# Altium PCB DueShield.PcbDoc
Units mil, origin at the board's own origin, x right, y up, seen from the top; angles counter-clockwise.
Board outline 4000 x 2100 mil, 2 copper layers (Top, Bottom), stack 65.748 mil thick; 9 components, 2 nets, 102 pads, 0 vias.
Unrouted connection lines stored in the file: 3.
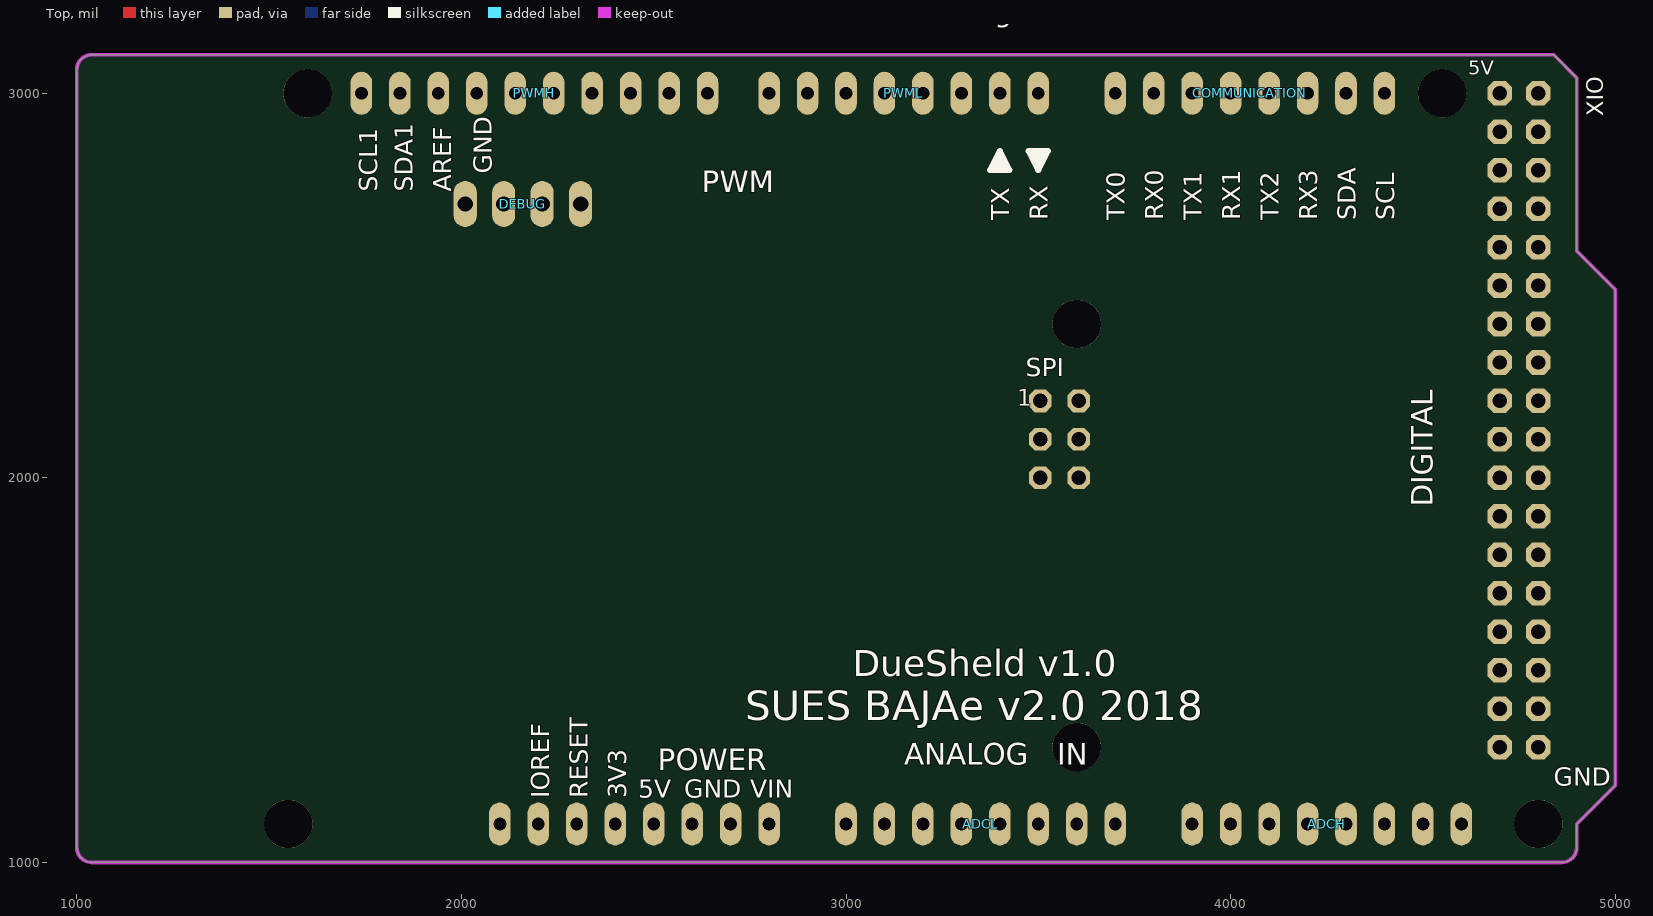
[diagram p0: Top view]
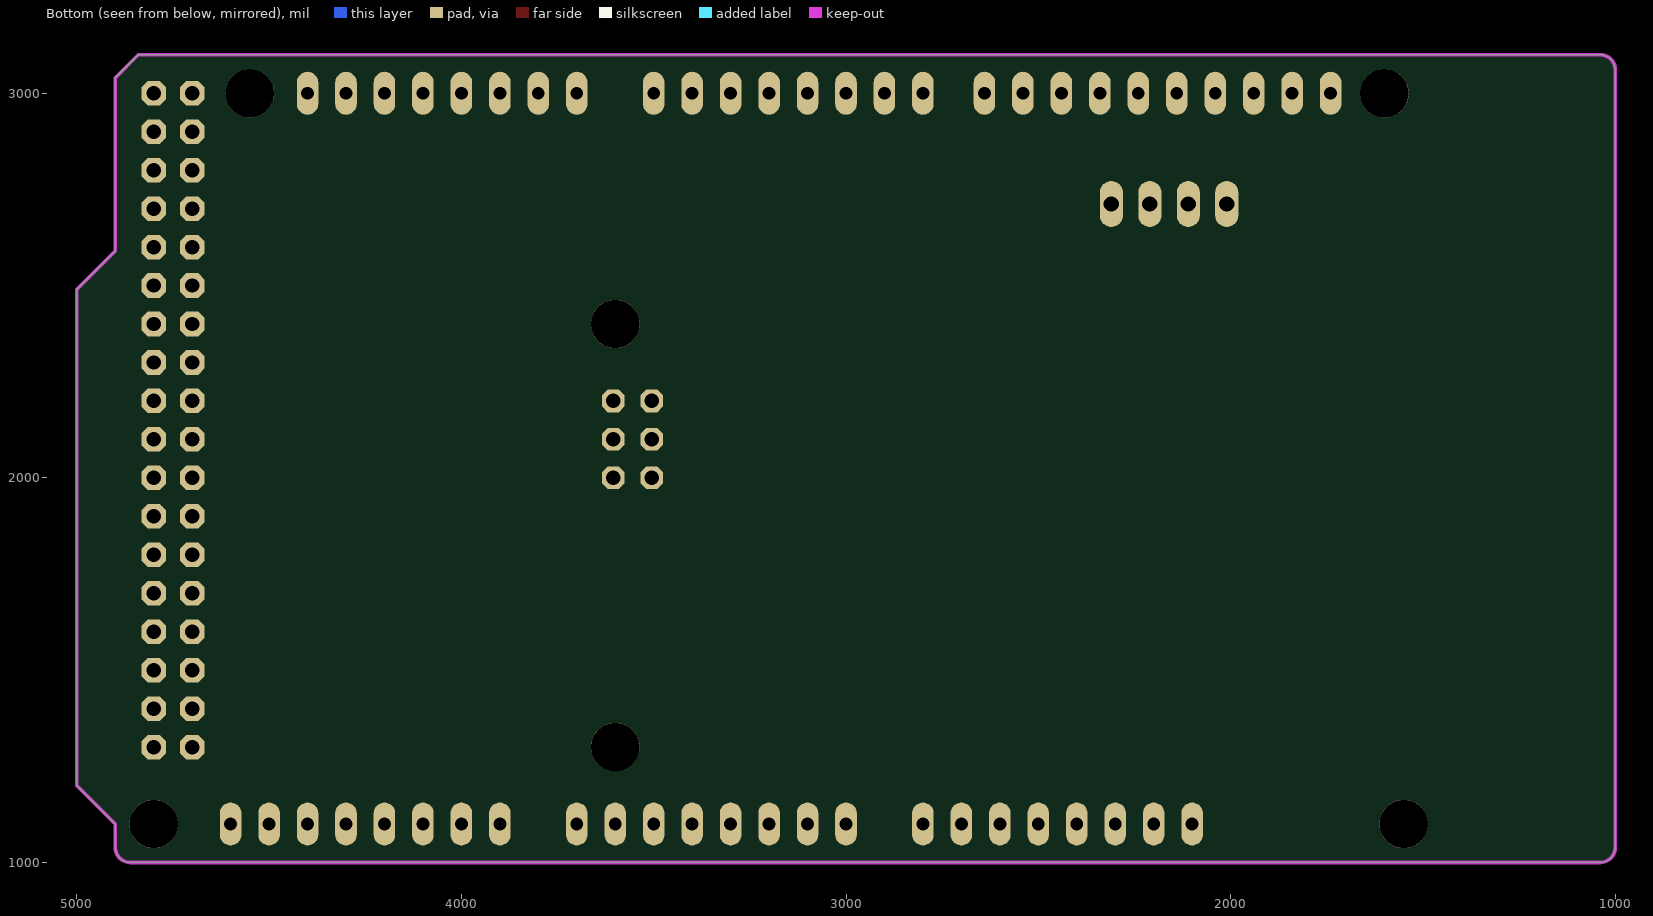
[diagram p1: Bottom view, seen from below]

## Layer stack, top to bottom
Top Solder: solder mask 0.4, Solder Resist, Dk 3.5
Top: signal copper 1.378
Dielectric 1: core 62.9921, FR-4, Dk 4.8
Bottom: signal copper 1.378
Bottom Solder: solder mask 0.4, Solder Resist, Dk 3.5

## Board outline
1039.37,3100 4840,3100 4900,3040 4900,2590 5000,2490 5000,1200 4900,1100 4900,1039.37 cw(c4860.63,1039.37) 4860.63,1000 1039.37,1000 cw(c1039.37,1039.37) 1000,1039.37 1000,3060.63 cw(c1039.37,3060.63)

## Design rules (kind name [scope] priority, off if disabled: settings)
Clearance [All] p1: gap=8 ignorepadtopadclearanceinfootprint=FALSE except(0: SMDPad-SMDPad SMDPad-THPad SMDPad-Via)
Clearance "Clearance (Same Net)" [All] p2: gap=0 ignorepadtopadclearanceinfootprint=FALSE except(6: SMDPad-SMDPad SMDPad-THPad SMDPad-Via)
HoleSize HoleSize_1 [All] p1: absolutevalues=TRUE maxlimit=100000 minlimit=16 maxpercent=80.000 minpercent=20.000
HoleSize [All] p2: absolutevalues=TRUE maxlimit=100 minlimit=1 maxpercent=80.000 minpercent=20.000
HoleToHoleClearance mdViaViaSameLayer [All] p1: gap=8 allowstackedmicrovias=TRUE
HoleToHoleClearance [All] p2: gap=10 allowstackedmicrovias=TRUE
PasteMaskExpansion mlMinCreamFrame [All] p1: expansion=3
PasteMaskExpansion [All] p2: expansion=0
PolygonConnect ThermalVias [IsVia] p1: connectstyle=Direct reliefconductorwidth=10 reliefentries=4 polygonreliefangle="90 Angle" airgapwidth=10
PolygonConnect [All] p2: connectstyle=Relief reliefconductorwidth=10 reliefentries=4 polygonreliefangle="90 Angle" airgapwidth=10
RoomDefinition DueShield [InComponentClass('DueShield')] p1: confinementstyle=ConfineIn formatcopy=TRUE lockcomponents=FALSE outline 0,0 2000,0 2000,1000 0,1000
RoutingVias [All] p1: holewidth=28 width=50 viastyle="Through Hole" minholewidth=28 minwidth=50 maxholewidth=28 maxwidth=50
SilkToSilkClearance [All] p1 off: silktosilkclearance=10
SilkToSolderMaskClearance [IsPad] p1 off: minsilkscreentomaskgap=10 clearancetoexposedcopper=TRUE
SolderMaskExpansion mlMinStopFrame [All] p1: expansion=2
SolderMaskExpansion [All] p2: expansion=4
Width Width_1 [All] p1: maxlimit=100000 minlimit=8 preferedwidth=10
Width [All] p2: maxlimit=10 minlimit=10 preferedwidth=10
25 further rules are at their usual default settings.

## Components (designator, comment, footprint, x,y, rotation, side; value= is the part's Value field where it differs from the comment)
ADCH "8x1F-H8.5" 1X08 4250,1100 r0 top
ADCL "8x1F-H8.5" 1X08 3350,1100 r0 top
COMMUNICATION "8x1F-H8.5" 1X08 4050,3000 r0 top
DEBUG "STRIP 4x1V M" 1X04 2160,2712 r180 top
POWER "8x1F-H8.5" 1X08 2450,1100 r0 top
PWMH "10x1F-H8.5" 1X10 2190,3000 r180 top
PWML "8x1F-H8.5" 1X08 3150,3000 r180 top
SPI "3x2M" 2X03 3555,2100 r270 top
XIO "18x2F-H8.5" 2X18 4750,2150 r270 top

## Footprints (in the part's own frame and the unit in brackets; to place one, negate y for a bottom-side part, rotate by r counter-clockwise, add the part's x,y. Pads: shape width x height; smd on the part's side, far side on the other; paste and mask are expansions set on the pad)
1X04 [mil] "1X04"
  oval 60x120 hole 40: 1(-150,0) 2(-50,0) 3(50,0) 4(150,0)
1X08 [mil] "1X08"
  oval 56x112 hole 33.46: 1(-350,0) 2(-250,0) 3(-150,0) 4(-50,0) 5(50,0) 6(150,0) 7(250,0) 8(350,0)
1X10 [mil] "1X10"
  oval 56x112 hole 33.46: 1(-450,0) 2(-350,0) 3(-250,0) 4(-150,0) 5(-50,0) 6(50,0) 7(150,0) 8(250,0) 9(350,0) 10(450,0)
2X03 [mil] "2X03"
  oct 59.08x59.08 hole 37.4: 1(-100,-50) 2(-100,50) 3(0,-50) 4(0,50) 5(100,-50) 6(100,50)
2X18 [mil] "2X18"
  oct 63.9x63.9 hole 37.4: 1(-850,-50) 2(-850,50) 3(-750,-50) 4(-750,50) 5(-650,-50) 6(-650,50) 7(-550,-50) 8(-550,50) 9(-450,-50) 10(-450,50) 11(-350,-50) 12(-350,50) 13(-250,-50) 14(-250,50) 15(-150,-50) 16(-150,50) 17(-50,-50) 18(-50,50) 19(50,-50) 20(50,50) 21(150,-50) 22(150,50) 23(250,-50) 24(250,50) 25(350,-50) 26(350,50) 27(450,-50) 28(450,50) 29(550,-50) 30(550,50) 31(650,-50) 32(650,50) 33(750,-50) 34(750,50) 35(850,-50) 36(850,50)

## Part data
ADCH ADCL COMMUNICATION POWER PWML: library part PINHD-1X8, "PIN HEADER"
DEBUG: library part PINHD-1X4, "PIN HEADER"
PWMH: library part PINHD-1X10, "PIN HEADER"
SPI: library part PINHD-2X3, "PIN HEADER"
XIO: library part PINHD-2X18, "PIN HEADER"

## Free pads (board coordinates)
  round 125.98 hole 125.98: 1(1550,1100) 1(1600,3000) 1(3600,1300) 1(3600,2400) 1(4550,3000) 1(4800,1100)

## Nets (pads, with @x,y where several pads share a name; then routed paths per layer and width w, separated by ;. In a path a pad name is that pad's centre, name@x,y a point inside that pad or via, vN(x,y) a via of type N, cw(c..) or ccw(c..) an arc to the next point about the centre after c; other vN are vias at no path point)
+5V: XIO.1 XIO.2
GND: PWMH.6 XIO.35 XIO.36
pads on no net: ADCH.1 ADCH.2 ADCH.3 ADCH.4 ADCH.5 ADCH.6 ADCH.7 ADCH.8 ADCL.1 ADCL.2 ADCL.3 ADCL.4 ADCL.5 ADCL.6 ADCL.7 ADCL.8 COMMUNICATION.1 COMMUNICATION.2 COMMUNICATION.3 COMMUNICATION.4 COMMUNICATION.5 COMMUNICATION.6 COMMUNICATION.7 COMMUNICATION.8 DEBUG.1 DEBUG.2 DEBUG.3 DEBUG.4 POWER.1 POWER.2 POWER.3 POWER.4 POWER.5 POWER.6 POWER.7 POWER.8 PWMH.1 PWMH.2 PWMH.3 PWMH.4 PWMH.5 PWMH.7 PWMH.8 PWMH.9 PWMH.10 PWML.1 PWML.2 PWML.3 PWML.4 PWML.5 PWML.6 PWML.7 PWML.8 SPI.1 SPI.2 SPI.3 SPI.4 SPI.5 SPI.6 XIO.3 XIO.4 XIO.5 XIO.6 XIO.7 XIO.8 XIO.9 XIO.10 XIO.11 XIO.12 XIO.13 XIO.14 XIO.15 XIO.16 XIO.17 XIO.18 XIO.19 XIO.20 XIO.21 XIO.22 XIO.23 XIO.24 XIO.25 XIO.26 XIO.27 XIO.28 XIO.29 XIO.30 XIO.31 XIO.32 XIO.33 XIO.34

## Keep-outs
Keep-Out Layer:
  the board outline again, w10
tRestrict:
  circle w16: c3600,1300 r100
  circle w12: c1600,3000 r100
  circle w12: c3600,2400 r100
  circle w12: c4550,3000 r100
  circle w12: c4800,1100 r100
  circle w12: c1550,1100 r100
bRestrict:
  circle w16: c3600,1300 r100
  circle w12: c1600,3000 r100
  circle w12: c3600,2400 r100
  circle w12: c4550,3000 r100
  circle w12: c4800,1100 r100
  circle w12: c1550,1100 r100

## Silkscreen, mask and mechanical layers (free items; w line width, h text height)
Top Overlay:
  lines w16: 3375,2800 3400,2850 3425,2800 ; 3375,2800 3400,2800 ; 3375,2800 3400,2825 ; 3400,2800 3400,2825 ; 3400,2800 3425,2800 ; 3400,2825 3425,2800 ; 3475,2850 3500,2850 ; 3475,2850 3500,2800 3525,2850 ; 3475,2850 3500,2825 ; 3500,2825 3525,2850 ; 3500,2825 3500,2850 ; 3500,2850 3525,2850
  text "MADE IN" at 2788,3186 h51
  text "Shanghai with love" at 3211,3186 h51
  text "5V" at 4617.69,3047.61 h37.4
  text "GND" at 2079.25,2790.48 h47.6 r90
  text "SCL1" at 1781.83,2743.48 h47.6 r90
  text "SDA1" at 1873.83,2743.48 h47.6 r90
  text "AREF" at 1973.83,2743.48 h47.6 r90
  text "PWM" at 2625,2742 h56.1
  text "TX" at 3425,2670 h47.6 r90
  text "RX" at 3525,2670 h47.6 r90
  text "TX0" at 3725,2670 h47.6 r90
  text "RX0" at 3825,2670 h47.6 r90
  text "TX1" at 3925,2670 h47.6 r90
  text "RX1" at 4025,2670 h47.6 r90
  text "TX2" at 4125,2670 h47.6 r90
  text "RX3" at 4225,2670 h47.6 r90
  text "SDA" at 4325,2670 h47.6 r90
  text "SCL" at 4425,2670 h47.6 r90
  text "1" at 3445.51,2187.03 h42.5
  text "DIGITAL" at 4525,1925 h56.1 r90
  text "DueSheld v1.0" at 3018,1484 h68
  text "SUES BAJAe v2.0 2018" at 2738,1370 h76.5
  text "ANALOG   IN" at 3151,1254 h56.1
  text "GND" at 4840,1200 h47.6
  text "5V" at 2459.48,1168.17 h47.6
  text "GND" at 2579.48,1168.17 h47.6
  text "VIN" at 2751.48,1168.17 h47.6
  text "IOREF" at 2228.83,1167.48 h47.6 r90
  text "RESET" at 2328.83,1167.48 h47.6 r90
  text "3V3" at 2428.83,1167.48 h47.6 r90
Dimension:
  the board outline again, w10
Top Assembly:
  lines w12: 2155,2810 2190,2775 2600,2775 ; 2820,2775 3260,2775 3300,2815 ; 2977,1264 3005,1292 3125,1292 ; 3405,2660 3450,2615 3500,2615 ; 3808,1292 4221,1292 4244,1269 ; 4285,2615 4355,2615 4400,2660 ; 4495,1905 4495,1445 4535,1405 ; 4495,2320 4495,2860 4535,2900 ; 4700,1225 4700,1205 4800,1205 4800,1225 ; 4700,3050 4700,3075 4800,3075 4800,3050
  text "9" at 2575,2875 h47.6 r90
  text "8" at 2675,2875 h47.6 r90
  text "7" at 2825,2875 h47.6 r90
  text "6" at 2925,2875 h47.6 r90
  text "5" at 3025,2875 h47.6 r90
  text "4" at 3125,2875 h47.6 r90
  text "3" at 3225,2875 h47.6 r90
  text "2" at 3325,2875 h47.6 r90
  text "1" at 3425,2875 h47.6 r90
  text "0" at 3525,2875 h47.6 r90
  text "22" at 4550,2875 h47.6
  text "14" at 3725,2840 h47.6 r90
  text "15" at 3825,2840 h47.6 r90
  text "16" at 3925,2840 h47.6 r90
  text "17" at 4025,2840 h47.6 r90
  text "18" at 4125,2840 h47.6 r90
  text "19" at 4225,2840 h47.6 r90
  text "20" at 4325,2840 h47.6 r90
  text "21" at 4425,2840 h47.6 r90
  text "13" at 2175,2825 h47.6 r90
  text "12" at 2275,2825 h47.6 r90
  text "11" at 2375,2825 h47.6 r90
  text "10" at 2475,2825 h47.6 r90
  text "24" at 4550,2775 h47.6
  text "26" at 4550,2675 h47.6
  text "28" at 4550,2575 h47.6
  text "30" at 4550,2475 h47.6
  text "31" at 4875,2475 h47.6
  text "32" at 4550,2375 h47.6
  text "33" at 4875,2375 h47.6
  text "34" at 4550,2275 h47.6
  text "35" at 4875,2275 h47.6
  text "36" at 4550,2175 h47.6
  text "37" at 4875,2175 h47.6
  text "38" at 4550,2075 h47.6
  text "39" at 4875,2075 h47.6
  text "40" at 4550,1975 h47.6
  text "41" at 4875,1975 h47.6
  text "42" at 4550,1875 h47.6
  text "43" at 4850,1875 h47.6
  text "44" at 4550,1775 h47.6
  text "45" at 4850,1775 h47.6
  text "46" at 4550,1675 h47.6
  text "47" at 4875,1675 h47.6
  text "48" at 4550,1575 h47.6
  text "49" at 4875,1575 h47.6
  text "50" at 4550,1475 h47.6
  text "51" at 4875,1475 h47.6
  text "52" at 4550,1375 h47.6
  text "53" at 4875,1375 h47.6
  text "0" at 3030,1185 h47.6 r90
  text "1" at 3120,1185 h47.6 r90
  text "2" at 3230,1185 h47.6 r90
  text "3" at 3330,1185 h47.6 r90
  text "4" at 3430,1185 h47.6 r90
  text "5" at 3525,1185 h47.6 r90
  text "6" at 3625,1185 h47.6 r90
  text "7" at 3730,1185 h47.6 r90
  text "8" at 3930,1185 h47.6 r90
  text "9" at 4030,1185 h47.6 r90
  text "10" at 4130,1185 h47.6 r90
  text "11" at 4222,1185 h47.6 r90
  text "DAC0" at 4318,1161 h34 r90
  text "DAC1" at 4418,1161 h34 r90
  text "CANRX" at 4518,1161 h34 r90
  text "CANTX" at 4613,1161 h34 r90
Unrouted:
  lines w0: 4700,1300 4800,1300 ; 4700,3000 4800,3000